# Allegro board VNA_Test_01.brd
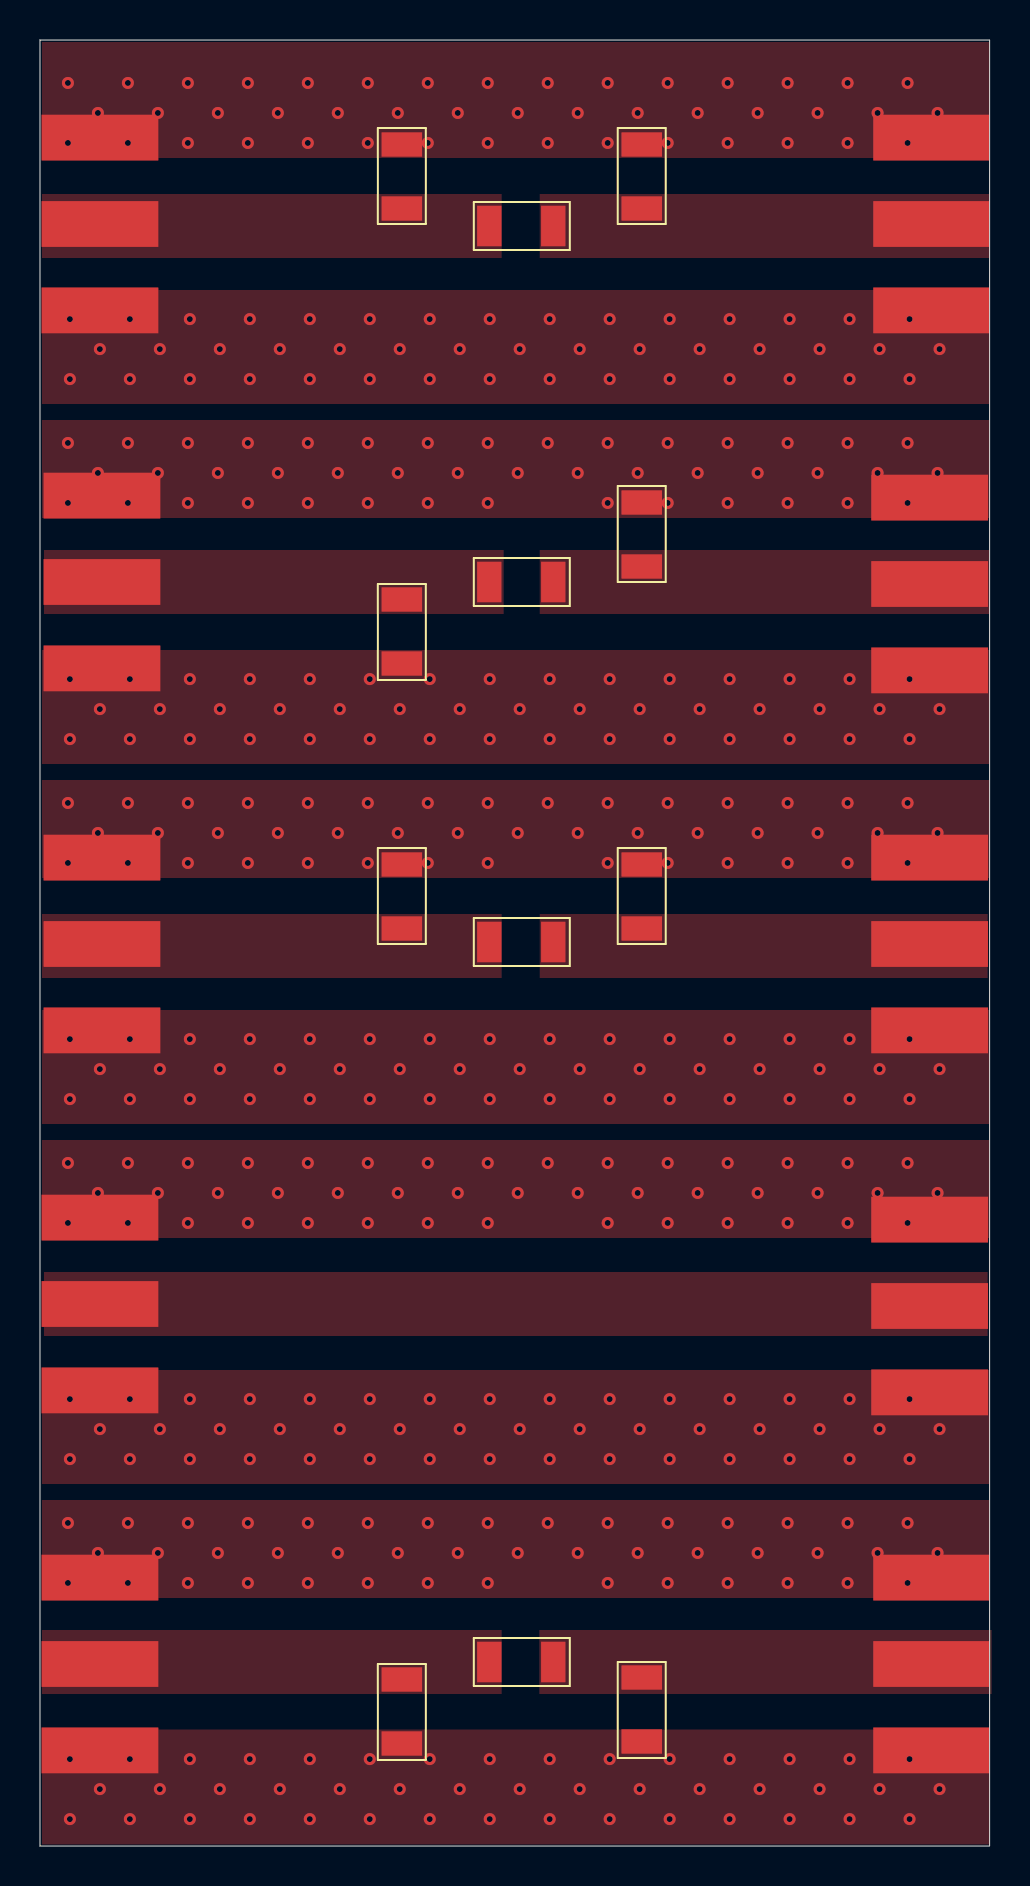
[diagram p0: board, top side]
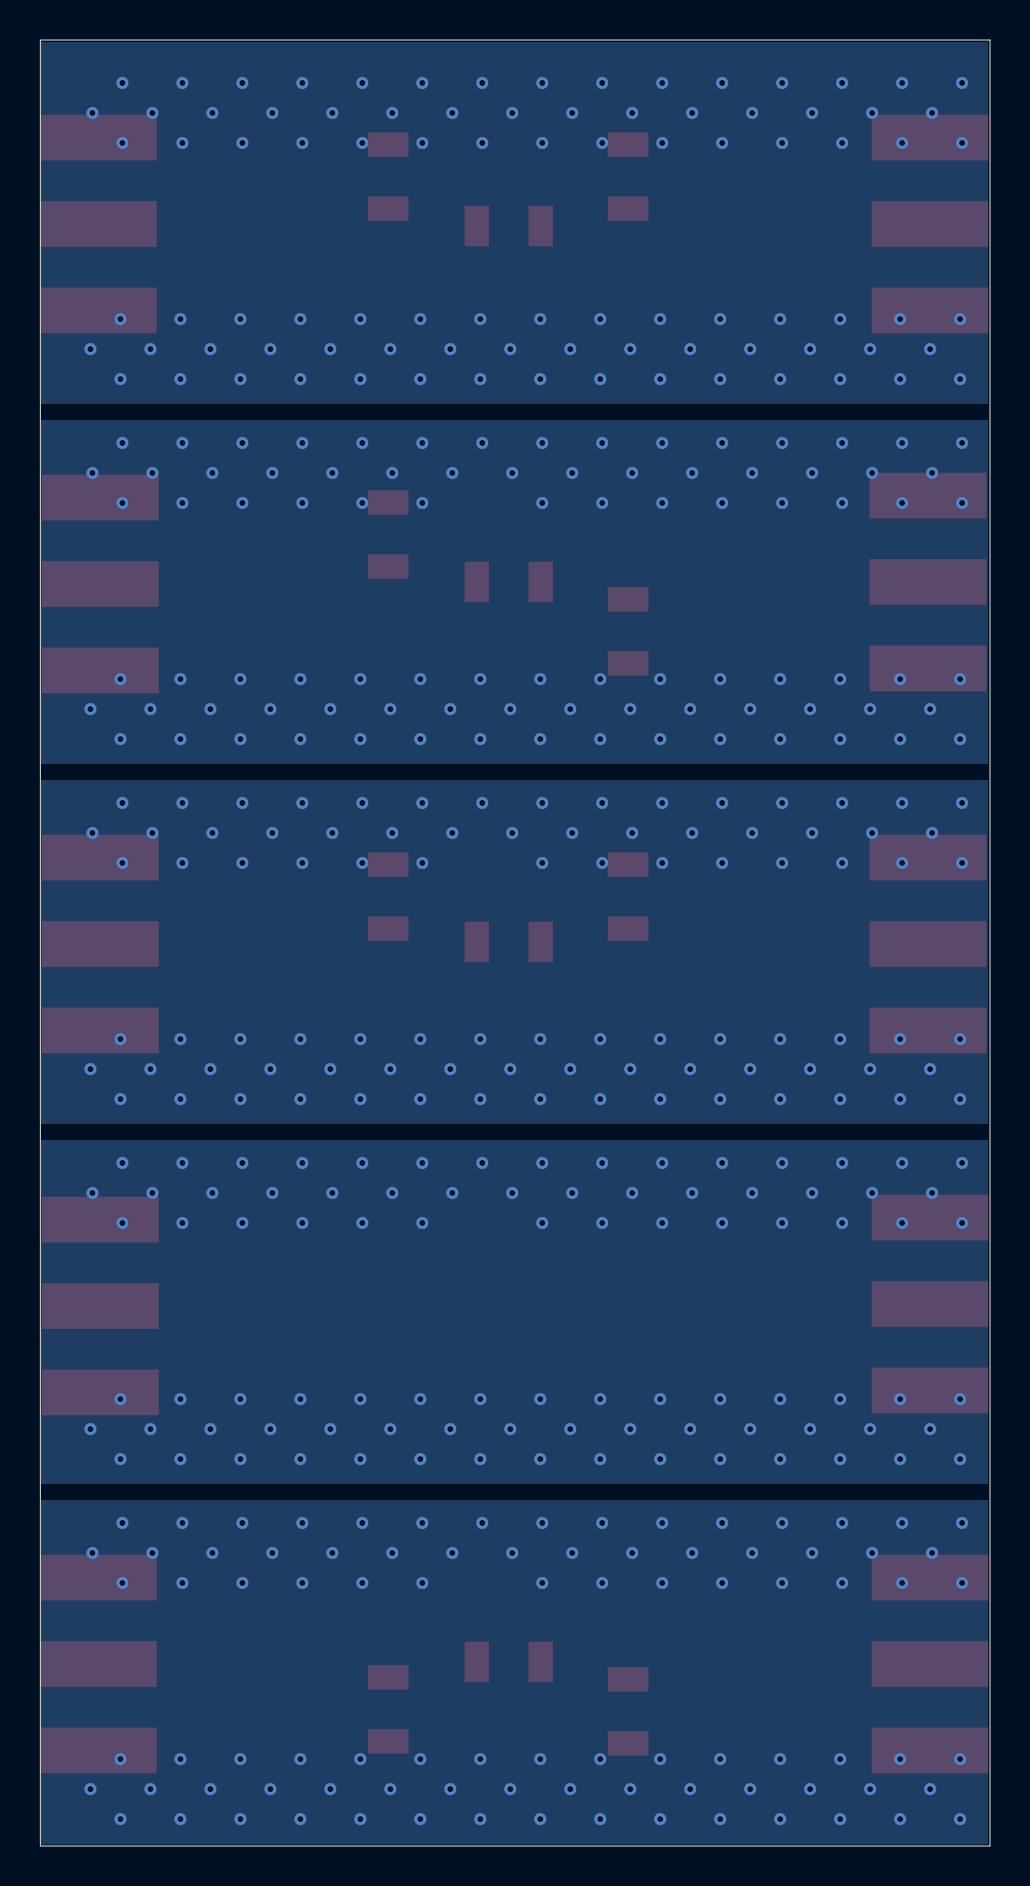
[diagram p1: board, bottom side, seen from below]

Outline 47.5 x 90.3 mm; copper layers: TOP, BOTTOM. Coordinates in mm from the lower left corner of the outline.
Outline path: 0,90.3 0,0 47.5,0 47.5,90.3 0,90.3

## Design rules (mm)
constraint set DEFAULT: min track width 0.127

## Placement (name value [footprint] x y rotation side)
J1  0732511150  [RF_SMA_0732511150]  3 81.1 0 top
J2  0732511150  [RF_SMA_0732511150]  44.6 81.1 180 top
J3  0732511150  [RF_SMA_0732511150]  3.1 63.2 0 top
J4  0732511150  [RF_SMA_0732511150]  44.5 63.1 180 top
J5  0732511150  [RF_SMA_0732511150]  3.1 45.1 0 top
J6  0732511150  [RF_SMA_0732511150]  44.5 45.1 180 top
J7  0732511150  [RF_SMA_0732511150]  3 27.1 0 top
J8  0732511150  [RF_SMA_0732511150]  44.5 27 180 top
J9  0732511150  [RF_SMA_0732511150]  3 9.1 0 top
J10  0732511150  [RF_SMA_0732511150]  44.6 9.1 180 top
R1  R 1206  [1206R]  30.1 83.5 90 top
R2  R 1206  [1206R]  18.1 83.5 90 top
R3  R 1206  [1206R]  24.1 81 0 top
R4  R 1206  [1206R]  30.1 65.6 90 top
R5  R 1206  [1206R]  18.1 60.7 270 top
R6  R 1206  [1206R]  24.1 63.2 0 top
R7  R 1206  [1206R]  30.1 47.5 90 top
R8  R 1206  [1206R]  18.1 47.5 90 top
R9  R 1206  [1206R]  24.1 45.2 0 top
R10  R 1206  [1206R]  24.1 9.2 0 top
R11  R 1206  [1206R]  18.1 6.7 270 top
R12  R 1206  [1206R]  30.1 6.8 270 top

## Library data of the parts
J1-J10 = rf_sma_0732511150
R1-R12 = R 1206

## Footprints (pads in the part's own frame, mm; a bottom-side part is the same pattern mirrored in y, then rotated)
1206R
  rect 1.22x2.03 smd: 1(-1.626,0) 2(1.574,0)
RF_SMA_0732511150
  rect 5.84x2.29 smd: 1(0,0) 2(0,-4.32) 3(0,4.32)

## Nets
GND: J1.2 J1.3 J2.2 J2.3 J3.2 J3.3 J4.2 J4.3 J5.2 J5.3 J6.2 J6.3 J7.2 J7.3 J8.2 J8.3 J9.2 J9.3 J10.2 J10.3 R1.2 R2.2 R4.2 R5.2 R7.2 R8.2 R11.2 R12.2
N01460: J1.1 R2.1 R3.1
N02048: J2.1 R1.1 R3.2
N03591: J3.1 R5.1 R6.1
N03629: J4.1 R4.1 R6.2
N03947: J5.1 R8.1 R9.1
N03985: J6.1 R7.1 R9.2
N04419: J7.1 J8.1
N04826: J9.1 R10.1 R11.1
N04838: J10.1 R10.2 R12.1

## Via types
v1: diameter 0.6, hole 0.3, TOP to BOTTOM, 446 vias

## Routing (per net, layer and track width the routed paths; a pad name or vN(x,y) marks a point on that pad's centre or on a via; arc(x,y) is an arc through that point)
GND:
  vias: v1(1.4,88.15) v1(1.4,85.15) v1(1.4,70.15) v1(1.4,67.15) v1(1.4,52.15) v1(1.4,49.15) v1(1.4,34.15) v1(1.4,31.15) v1(1.4,16.15) v1(1.4,13.15) v1(1.5,76.35) v1(1.5,73.35) v1(1.5,58.35) v1(1.5,55.35) v1(1.5,40.35) v1(1.5,37.35) v1(1.5,22.35) v1(1.5,19.35) v1(1.5,4.35) v1(1.5,1.35) v1(2.9,86.65) v1(2.9,68.65) v1(2.9,50.65) v1(2.9,32.65) v1(2.9,14.65) v1(3,74.85) v1(3,56.85) v1(3,38.85) v1(3,20.85) v1(3,2.85) v1(4.4,88.15) v1(4.4,85.15) v1(4.4,70.15) v1(4.4,67.15) v1(4.4,52.15) v1(4.4,49.15) v1(4.4,34.15) v1(4.4,31.15) v1(4.4,16.15) v1(4.4,13.15) v1(4.5,76.35) v1(4.5,73.35) v1(4.5,58.35) v1(4.5,55.35) v1(4.5,40.35) v1(4.5,37.35) v1(4.5,22.35) v1(4.5,19.35) v1(4.5,4.35) v1(4.5,1.35) v1(5.9,86.65) v1(5.9,68.65) v1(5.9,50.65) v1(5.9,32.65) v1(5.9,14.65) v1(6,74.85) v1(6,56.85) v1(6,38.85) v1(6,20.85) v1(6,2.85) v1(7.4,88.15) v1(7.4,85.15) v1(7.4,70.15) v1(7.4,67.15) v1(7.4,52.15) v1(7.4,49.15) v1(7.4,34.15) v1(7.4,31.15) v1(7.4,16.15) v1(7.4,13.15) v1(7.5,76.35) v1(7.5,73.35) v1(7.5,58.35) v1(7.5,55.35) v1(7.5,40.35) v1(7.5,37.35) v1(7.5,22.35) v1(7.5,19.35) v1(7.5,4.35) v1(7.5,1.35) v1(8.9,86.65) v1(8.9,68.65) v1(8.9,50.65) v1(8.9,32.65) v1(8.9,14.65) v1(9,74.85) v1(9,56.85) v1(9,38.85) v1(9,20.85) v1(9,2.85) v1(10.4,88.15) v1(10.4,85.15) v1(10.4,70.15) v1(10.4,67.15) v1(10.4,52.15) v1(10.4,49.15) v1(10.4,34.15) v1(10.4,31.15) v1(10.4,16.15) v1(10.4,13.15) v1(10.5,76.35) v1(10.5,73.35) v1(10.5,58.35) v1(10.5,55.35) v1(10.5,40.35) v1(10.5,37.35) v1(10.5,22.35) v1(10.5,19.35) v1(10.5,4.35) v1(10.5,1.35) v1(11.9,86.65) v1(11.9,68.65) v1(11.9,50.65) v1(11.9,32.65) v1(11.9,14.65) v1(12,74.85) v1(12,56.85) v1(12,38.85) v1(12,20.85) v1(12,2.85) v1(13.4,88.15) v1(13.4,85.15) v1(13.4,70.15) v1(13.4,67.15) v1(13.4,52.15) v1(13.4,49.15) v1(13.4,34.15) v1(13.4,31.15) v1(13.4,16.15) v1(13.4,13.15) v1(13.5,76.35) v1(13.5,73.35) v1(13.5,58.35) v1(13.5,55.35) v1(13.5,40.35) v1(13.5,37.35) v1(13.5,22.35) v1(13.5,19.35) v1(13.5,4.35) v1(13.5,1.35) v1(14.9,86.65) v1(14.9,68.65) v1(14.9,50.65) v1(14.9,32.65) v1(14.9,14.65) v1(15,74.85) v1(15,56.85) v1(15,38.85) v1(15,20.85) v1(15,2.85) v1(16.4,88.15) v1(16.4,85.15) v1(16.4,70.15) v1(16.4,67.15) v1(16.4,52.15) v1(16.4,49.15) v1(16.4,34.15) v1(16.4,31.15) v1(16.4,16.15) v1(16.4,13.15) v1(16.5,76.35) v1(16.5,73.35) v1(16.5,58.35) v1(16.5,55.35) v1(16.5,40.35) v1(16.5,37.35) v1(16.5,22.35) v1(16.5,19.35) v1(16.5,4.35) v1(16.5,1.35) v1(17.9,86.65) v1(17.9,68.65) v1(17.9,50.65) v1(17.9,32.65) v1(17.9,14.65) v1(18,74.85) v1(18,56.85) v1(18,38.85) v1(18,20.85) v1(18,2.85) v1(19.4,88.15) v1(19.4,85.15) v1(19.4,70.15) v1(19.4,67.15) v1(19.4,52.15) v1(19.4,49.15) v1(19.4,34.15) v1(19.4,31.15) v1(19.4,16.15) v1(19.4,13.15) v1(19.5,76.35) v1(19.5,73.35) v1(19.5,58.35) v1(19.5,55.35) v1(19.5,40.35) v1(19.5,37.35) v1(19.5,22.35) v1(19.5,19.35) v1(19.5,4.35) v1(19.5,1.35) v1(20.9,86.65) v1(20.9,68.65) v1(20.9,50.65) v1(20.9,32.65) v1(20.9,14.65) v1(21,74.85) v1(21,56.85) v1(21,38.85) v1(21,20.85) v1(21,2.85) v1(22.4,88.15) v1(22.4,85.15) v1(22.4,70.15) v1(22.4,67.15) v1(22.4,52.15) v1(22.4,49.15) v1(22.4,34.15) v1(22.4,31.15) v1(22.4,16.15) v1(22.4,13.15) v1(22.5,76.35) v1(22.5,73.35) v1(22.5,58.35) v1(22.5,55.35) v1(22.5,40.35) v1(22.5,37.35) v1(22.5,22.35) v1(22.5,19.35) v1(22.5,4.35) v1(22.5,1.35) v1(23.9,86.65) v1(23.9,68.65) v1(23.9,50.65) v1(23.9,32.65) v1(23.9,14.65) v1(24,74.85) v1(24,56.85) v1(24,38.85) v1(24,20.85) v1(24,2.85) v1(25.4,88.15) v1(25.4,85.15) v1(25.4,70.15) v1(25.4,52.15) v1(25.4,34.15) v1(25.4,16.15) v1(25.5,76.35) v1(25.5,73.35) v1(25.5,58.35) v1(25.5,55.35) v1(25.5,40.35) v1(25.5,37.35) v1(25.5,22.35) v1(25.5,19.35) v1(25.5,4.35) v1(25.5,1.35) v1(26.9,86.65) v1(26.9,68.65) v1(26.9,50.65) v1(26.9,32.65) v1(26.9,14.65) v1(27,74.85) v1(27,56.85) v1(27,38.85) v1(27,20.85) v1(27,2.85) v1(28.4,88.15) v1(28.4,85.15) v1(28.4,70.15) v1(28.4,67.15) v1(28.4,52.15) v1(28.4,49.15) v1(28.4,34.15) v1(28.4,31.15) v1(28.4,16.15) v1(28.4,13.15) v1(28.5,76.35) v1(28.5,73.35) v1(28.5,58.35) v1(28.5,55.35) v1(28.5,40.35) v1(28.5,37.35) v1(28.5,22.35) v1(28.5,19.35) v1(28.5,4.35) v1(28.5,1.35) v1(29.9,86.65) v1(29.9,68.65) v1(29.9,50.65) v1(29.9,32.65) v1(29.9,14.65) v1(30,74.85) v1(30,56.85) v1(30,38.85) v1(30,20.85) v1(30,2.85) v1(31.4,88.15) v1(31.4,85.15) v1(31.4,70.15) v1(31.4,67.15) v1(31.4,52.15) v1(31.4,49.15) v1(31.4,34.15) v1(31.4,31.15) v1(31.4,16.15) v1(31.4,13.15) v1(31.5,76.35) v1(31.5,73.35) v1(31.5,58.35) v1(31.5,55.35) v1(31.5,40.35) v1(31.5,37.35) v1(31.5,22.35) v1(31.5,19.35) v1(31.5,4.35) v1(31.5,1.35) v1(32.9,86.65) v1(32.9,68.65) v1(32.9,50.65) v1(32.9,32.65) v1(32.9,14.65) v1(33,74.85) v1(33,56.85) v1(33,38.85) v1(33,20.85) v1(33,2.85) v1(34.4,88.15) v1(34.4,85.15) v1(34.4,70.15) v1(34.4,67.15) v1(34.4,52.15) v1(34.4,49.15) v1(34.4,34.15) v1(34.4,31.15) v1(34.4,16.15) v1(34.4,13.15) v1(34.5,76.35) v1(34.5,73.35) v1(34.5,58.35) v1(34.5,55.35) v1(34.5,40.35) v1(34.5,37.35) v1(34.5,22.35) v1(34.5,19.35) v1(34.5,4.35) v1(34.5,1.35) v1(35.9,86.65) v1(35.9,68.65) v1(35.9,50.65) v1(35.9,32.65) v1(35.9,14.65) v1(36,74.85) v1(36,56.85) v1(36,38.85) v1(36,20.85) v1(36,2.85) v1(37.4,88.15) v1(37.4,85.15) v1(37.4,70.15) v1(37.4,67.15) v1(37.4,52.15) v1(37.4,49.15) v1(37.4,34.15) v1(37.4,31.15) v1(37.4,16.15) v1(37.4,13.15) v1(37.5,76.35) v1(37.5,73.35) v1(37.5,58.35) v1(37.5,55.35) v1(37.5,40.35) v1(37.5,37.35) v1(37.5,22.35) v1(37.5,19.35) v1(37.5,4.35) v1(37.5,1.35) v1(38.9,86.65) v1(38.9,68.65) v1(38.9,50.65) v1(38.9,32.65) v1(38.9,14.65) v1(39,74.85) v1(39,56.85) v1(39,38.85) v1(39,20.85) v1(39,2.85) v1(40.4,88.15) v1(40.4,85.15) v1(40.4,70.15) v1(40.4,67.15) v1(40.4,52.15) v1(40.4,49.15) v1(40.4,34.15) v1(40.4,31.15) v1(40.4,16.15) v1(40.4,13.15) v1(40.5,76.35) v1(40.5,73.35) v1(40.5,58.35) v1(40.5,55.35) v1(40.5,40.35) v1(40.5,37.35) v1(40.5,22.35) v1(40.5,19.35) v1(40.5,4.35) v1(40.5,1.35) v1(41.9,86.65) v1(41.9,68.65) v1(41.9,50.65) v1(41.9,32.65) v1(41.9,14.65) v1(42,74.85) v1(42,56.85) v1(42,38.85) v1(42,20.85) v1(42,2.85) v1(43.4,88.15) v1(43.4,85.15) v1(43.4,70.15) v1(43.4,67.15) v1(43.4,52.15) v1(43.4,49.15) v1(43.4,34.15) v1(43.4,31.15) v1(43.4,16.15) v1(43.4,13.15) v1(43.5,76.35) v1(43.5,73.35) v1(43.5,58.35) v1(43.5,55.35) v1(43.5,40.35) v1(43.5,37.35) v1(43.5,22.35) v1(43.5,19.35) v1(43.5,4.35) v1(43.5,1.35) v1(44.9,86.65) v1(44.9,68.65) v1(44.9,50.65) v1(44.9,32.65) v1(44.9,14.65) v1(45,74.85) v1(45,56.85) v1(45,38.85) v1(45,20.85) v1(45,2.85)

## Copper pours and planes (outline as drawn; the poured copper is in the pictures)
GND on TOP: 0.1,12.4 0.1,23.8 47.5,23.8 47.5,12.4
GND on TOP: 0.1,66.4 0.1,77.8 47.5,77.8 47.5,66.4
GND on TOP: 0.1,0.07 0.1,5.82 47.48,5.82 47.48,0.07
GND on TOP: 0.1,48.4 0.1,59.8 47.5,59.8 47.5,48.4
GND on TOP: 0.1,30.4 0.1,41.8 47.5,41.8 47.5,30.4
GND on TOP: 0.1,84.4 0.1,90.2 47.5,90.2 47.5,84.4
GND on BOTTOM: 0.1,90.2 47.48,90.2 47.48,0.07 0.1,0.07
N01460 on TOP: 0.1,82.6 0.1,79.4 23.1,79.4 23.1,82.6
N02048 on TOP: 25,82.6 25,79.4 47.5,79.4 47.5,82.6
N03591 on TOP: 0.2,64.8 0.2,61.6 23.2,61.6 23.2,64.8
N03629 on TOP: 25,64.8 25,61.6 47.5,61.6 47.5,64.8
N03947 on TOP: 0.1,46.6 0.1,43.4 23.1,43.4 23.1,46.6
N03985 on TOP: 25,46.6 25,43.4 47.4,43.4 47.4,46.6
N04419 on TOP: 0.2,28.7 0.2,25.5 47.4,25.5 47.4,28.7
N04826 on TOP: 0.1,10.8 0.1,7.6 23.1,7.6 23.1,10.8
N04838 on TOP: 24.98,10.8 24.98,7.6 47.6,7.6 47.6,10.8

## Text on the board
XSECTION_CHART: *  SURFACE - AIR 0 MM | L1 TOP CONDUCTOR - COPPER 0.0305 MM | *  DIELECTRIC - FR-4 1.5 MM | L2 BOTTOM PLANE - COPPER 0.0305 MM | DESIGN CROSS SECTION CHART | ___________________________ | FIGURE | FINISHED_SIZE | 0.3 | 0.7 | DRILL CHART: TOP to BOTTOM | ALL UNITS ARE IN MILLIMETERS | TOLERANCE_DRILL | +0.05/-0.05 | PLATED | NON-PLATED | QTY | 446 | 143 | 589 | TOTAL HOLES:
